# Altium PCB DRV8711MOD.PcbDoc
Units mm, origin at the board's own origin, x right, y up, seen from the top; angles counter-clockwise.
Board outline 81.84 x 52 mm, 2 copper layers (Top Layer, Bottom Layer); 20 components, 34 nets, 159 pads, 268 vias.
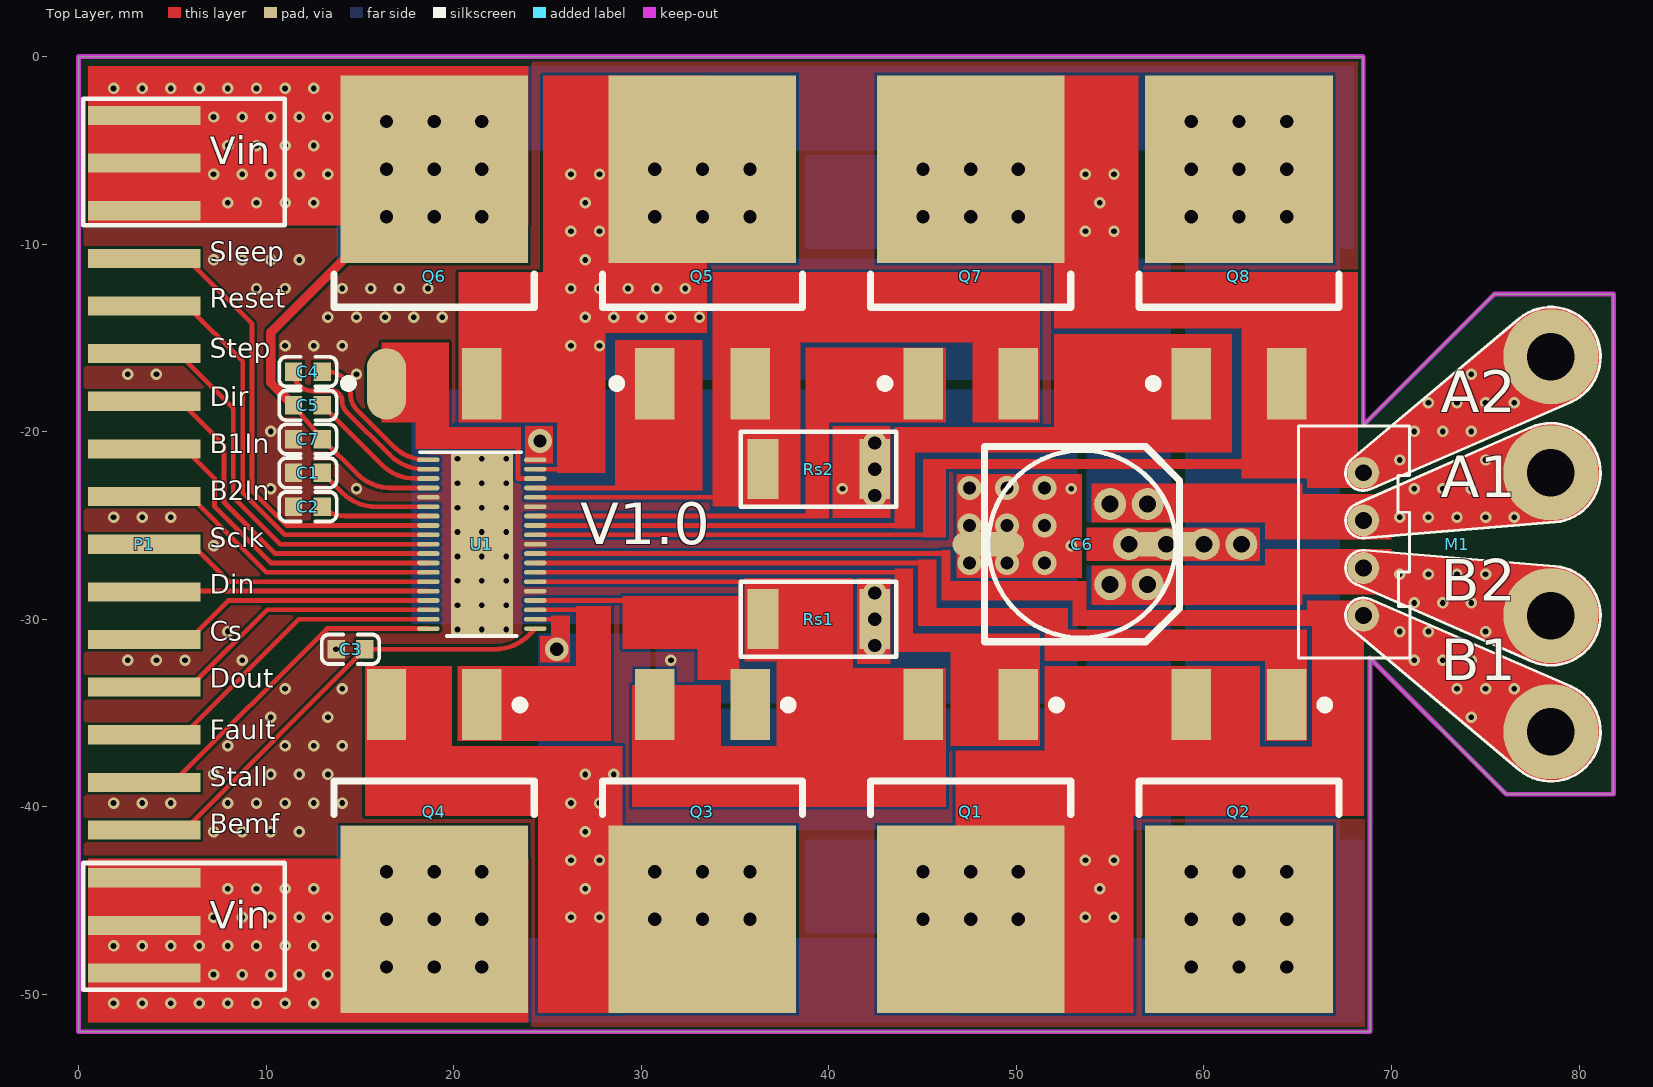
[diagram p0: Top Layer view]
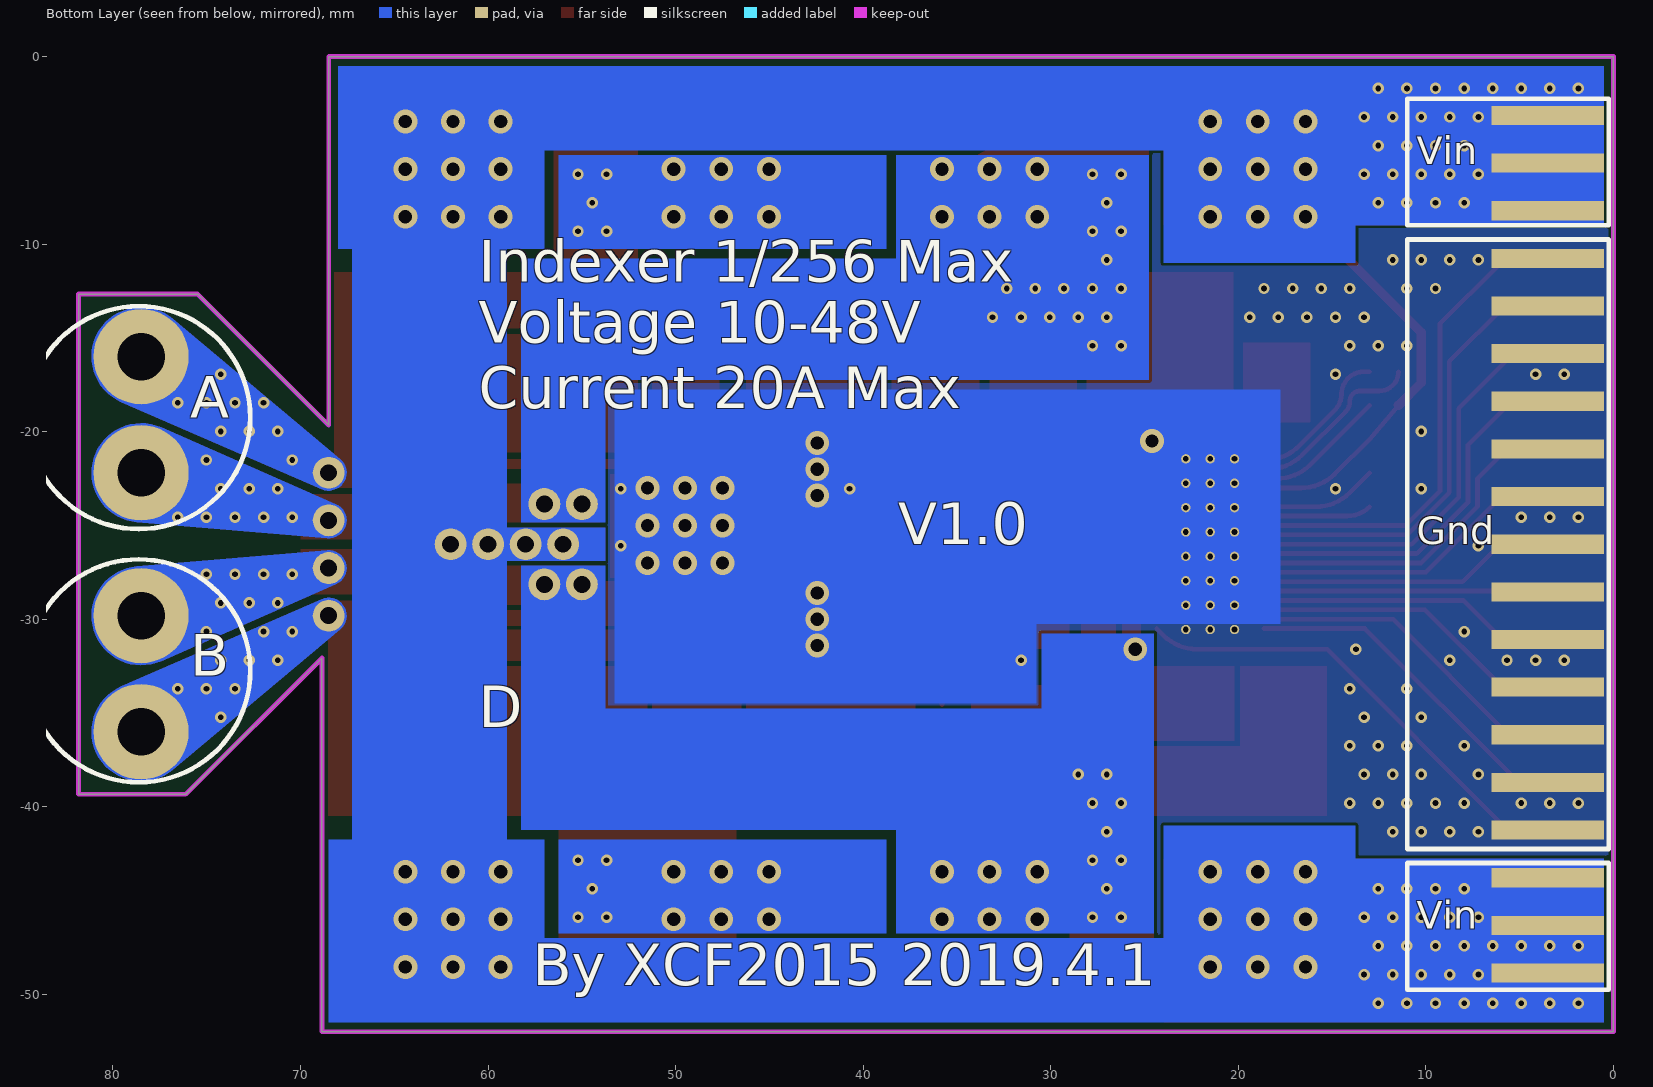
[diagram p1: Bottom Layer view, seen from below]
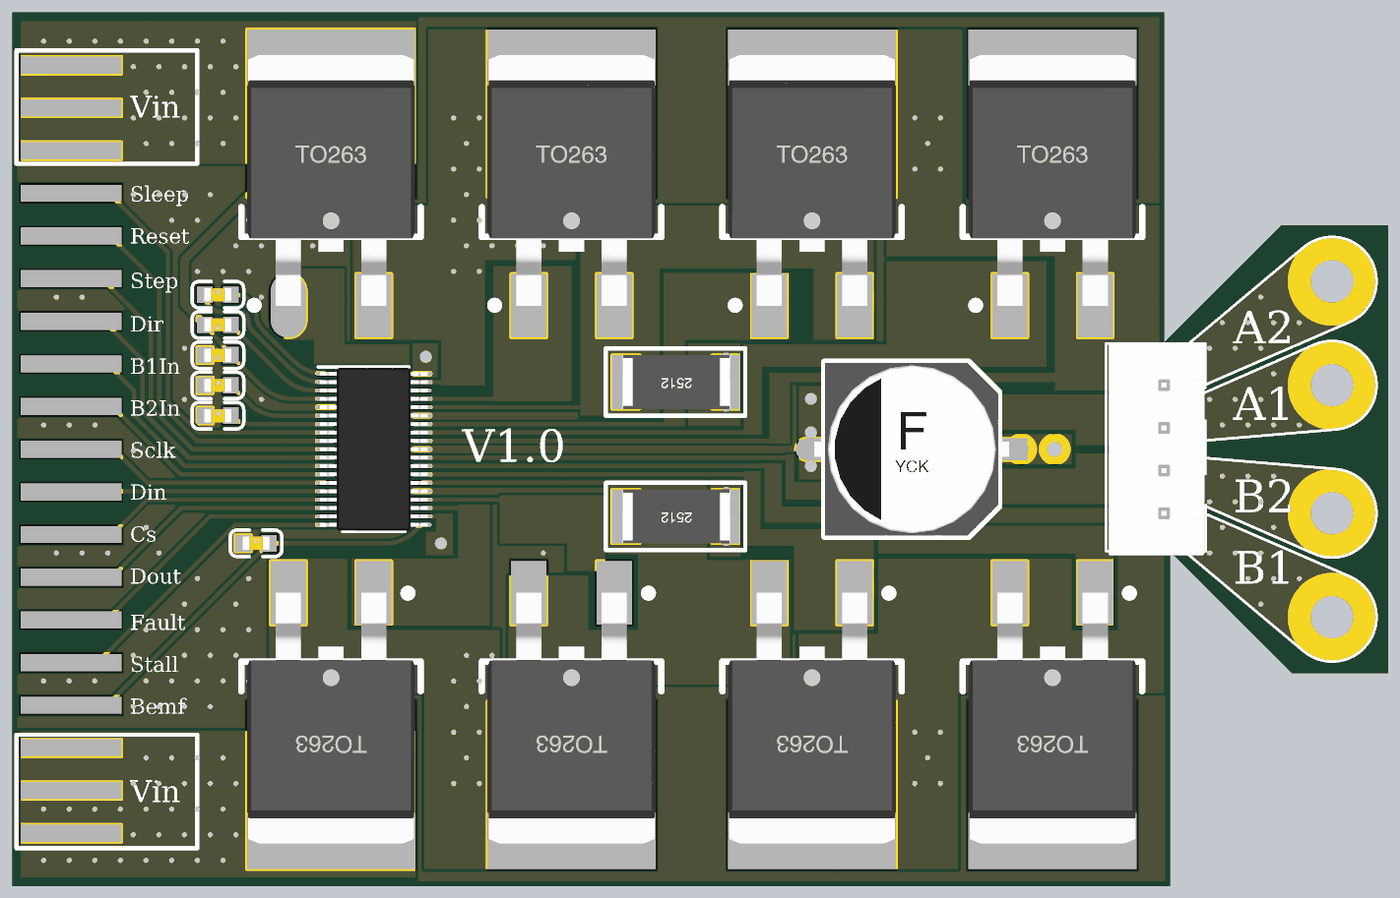
[diagram p2: 3D render of the assembled board from above, using the file's embedded part models]

## Layer stack, top to bottom
Top Solder: solder mask 0.0102, Solder Resist, Dk 3.5
Top Layer: signal copper 0.0356
Dielectric 1: dielectric 0.32, FR-4, Dk 4.8
Bottom Layer: signal copper 0.0356
Bottom Solder: solder mask 0.0102, Solder Resist, Dk 3.5

## Board outline
0,-52 0,0 68.5,0 68.5,-19.65 75.485,-12.665 81.835,-12.665 81.835,-39.335 76.12,-39.335 68.856,-32.071 68.856,-52

## Design rules (kind name [scope] priority, off if disabled: settings)
Clearance [All] p1: gap=0.152 ignorepadtopadclearanceinfootprint=FALSE
HoleSize [All] p1: absolutevalues=TRUE maxlimit=254 minlimit=0.305 maxpercent=80.000 minpercent=20.000
MinimumSolderMaskSliver [All] p1: minsoldermaskwidth=0
PolygonConnect [All] p1: connectstyle=Direct reliefconductorwidth=0.254 reliefentries=4 polygonreliefangle="90 Angle" airgapwidth=0.254
RoutingVias [All] p1: holewidth=0.305 width=0.61 viastyle="Through Hole" minholewidth=0.305 minwidth=0.61 maxholewidth=0.711 maxwidth=1.27
SMDNeckDown [All] p1: percent=120.000
SilkToSilkClearance [All] p1: silktosilkclearance=0
SilkToSolderMaskClearance [IsPad] p1: minsilkscreentomaskgap=0 clearancetoexposedcopper=TRUE
SolderMaskExpansion [All] p1: expansion=0.102
Width [All] p1: maxlimit=254 minlimit=0.152 preferedwidth=0.229
26 further rules are at their usual default settings.

## Components (designator, comment, footprint, x,y, rotation, side; value= is the part's Value field where it differs from the comment)
C1 "100nF(104) 10% 50V" 0603_C 12.23,-22.2 r0 top
C2 "100nF(104) 10% 50V" 0603_C 12.23,-24 r0 top
C3 "100nF(104) 10% 50V" 0603_C 14.5,-31.6 r0 top
C4 "100nF(104) 10% 50V" 0603_C 12.23,-16.8 r0 top
C5 "100nF(104) 10% 50V" 0603_C 12.23,-18.6 r180 top
C6 "220u" "CM F(10*10.2)" 53.5,-26 r0 top
C7 "100nF(104) 10% 50V" 0603_C 12.23,-20.4 r180 top
M1 "12V" MotorStep 68.5,-26 r270 top
P1 "Header 2X11" "TB2.54 19x2" 3.5,-3.14 r0 top
Q1 "2SK3615" IRF3205#1 47.567,-46 r180 top
Q2 "2SK3615" IRF3205#1 61.87,-46 r180 top
Q3 "2SK3615" IRF3205#1 33.263,-46 r180 top
Q4 "2SK3615" IRF3205#1 18.96,-46 r180 top
Q5 "2SK3615" IRF3205#1 33.263,-6 r0 top
Q6 "2SK3615" IRF3205#2 18.96,-6 r0 top
Q7 "2SK3615" IRF3205#1 47.567,-6 r0 top
Q8 "2SK3615" IRF3205#1 61.87,-6 r0 top
Rs1 "0.01R" "R 2512_L" 39.5,-30 r180 top
Rs2 "0.01R" "R 2512_L" 39.5,-22 r180 top
U1 "DRV8711DCPR" DCP0038A_L 21.5,-26 r0 top value=Value

## Footprints (in the part's own frame and the unit in brackets; to place one, negate y for a bottom-side part, rotate by r counter-clockwise, add the part's x,y. Pads: shape width x height; smd on the part's side, far side on the other; paste and mask are expansions set on the pad)
0603_C [mm]
  rect 0.93x0.98 smd: 1(-0.77,0) 2(0.77,0)
  silkscreen extent -1.53,-0.79 1.54,0.79, body extent -0.8,-0.4 0.8,0.4, height 0.3
"CM F(10*10.2)" [mm] "贴片电解电容，直径10mm，高10.2mm"
  rect 3.8x1.3 smd: 1(5,0)
  oval 3.8x1.3 smd: 2(-5,0)
  silkscreen extent -5.2,-5.2 5.2,5.2, body extent -5.8,-5.15 5.8,5.15, height 10.2
DCP0038A_L [mm]
  oval 1.2x0.25 smd paste+0 mask+0.051: 1(-2.85,4.5) 2(-2.85,4) 3(-2.85,3.5) 4(-2.85,3) 5(-2.85,2.5) 6(-2.85,2) 7(-2.85,1.5) 8(-2.85,1) 9(-2.85,0.5) 10(-2.85,0) 11(-2.85,-0.5) 12(-2.85,-1) 13(-2.85,-1.5) 14(-2.85,-2) 15(-2.85,-2.5) 16(-2.85,-3) 17(-2.85,-3.5) 18(-2.85,-4) 19(-2.85,-4.5) 20(2.85,-4.5) 21(2.85,-4) 22(2.85,-3.5) 23(2.85,-3) 24(2.85,-2.5) 25(2.85,-2) 26(2.85,-1.5) 27(2.85,-1) 28(2.85,-0.5) 29(2.85,0) 30(2.85,0.5) 31(2.85,1) 32(2.85,1.5) 33(2.85,2) 34(2.85,2.5) 35(2.85,3) 36(2.85,3.5) 37(2.85,4) 38(2.85,4.5)
  round 0.61 / inner round 1.524 / far side round 0.5 hole 0.305 mask+0.051: 39(-1.3,-4.55) 39(-1.3,-3.25) 39(-1.3,3.25) 39(-1.3,4.55) 39(0,-4.55) 39(0,-3.25) 39(0,-1.95) 39(0,-0.65) 39(0,0.65) 39(0,1.95) 39(0,3.25) 39(0,4.55) 39(1.3,-4.55) 39(1.3,-3.25) 39(1.3,3.25) 39(1.3,4.55)
  round 0.61 / inner round 1.524 / far side round 0.5 hole 0.305 mask-0.152: 39(-1.3,-1.95) 39(-1.3,-0.65) 39(-1.3,0.65) 39(-1.3,1.95) 39(1.3,-1.95) 39(1.3,-0.65) 39(1.3,0.65) 39(1.3,1.95)
  rect 3.302x9.7 smd paste-4.837 mask-4.839: 39(0,0)
  silkscreen extent -3.3,-4.9 2.1,4.9, body extent -3.2,-4.85 3.2,4.85, height 1.09
IRF3205#1 [mm] "263，3脚晶体管"
  rect 2.1x3.8 smd: 1(-2.54,-11.45) 3(2.54,-11.45)
  rect 10x10 smd: 2(0,0)
  silkscreen extent -5.33,-11.63 5.33,-5.59, body extent -5,-11.46 5,3.47, height 4.5
IRF3205#2 [mm] "263，3脚晶体管"
  oval 2.1x3.8 smd: 1(-2.54,-11.45)
  rect 10x10 smd: 2(0,0)
  rect 2.1x3.8 smd: 3(2.54,-11.45)
  silkscreen extent -5.33,-11.63 5.33,-5.59, body extent -5,-11.46 5,3.47, height 4.5
MotorStep [mm] "接插件，4P"
  round 5.08 hole 2.54: 1(-10,10) 2(-3.81,10) 3(3.81,10) 4(10,10)
  round 1.7 hole 0.9: 1(-3.81,0) 2(-1.27,0) 3(1.27,0) 4(3.81,0)
  Top Layer region: -4.539,-0.612 -12.023,8.301 -12.584,9.453 -12.538,10.734 -11.894,11.842 -10.804,12.516 -9.525,12.599 -8.358,12.069 -7.577,11.053 -7.577,11.053 -2.937,0.379 -2.86,-0.062 -2.994,-0.49 -3.309,-0.809 -3.735,-0.949 -4.178,-0.878 -4.539,-0.612
  Top Layer region: -2.141,-0.382 -6.229,8.939 -6.443,10.218 -6.022,11.444 -5.069,12.322 -3.812,12.642 -2.555,12.325 -1.6,11.448 -1.178,10.222 -1.178,10.222 -0.322,0.08 -0.322,0.08 -0.388,-0.357 -0.644,-0.717 -1.036,-0.922 -1.478,-0.929 -1.875,-0.735 -2.141,-0.382
  Top Layer region: 0.322,0.08 0.388,-0.357 0.644,-0.717 1.036,-0.922 1.478,-0.929 1.875,-0.735 2.141,-0.382 2.141,-0.382 2.141,-0.382 6.229,8.939 6.443,10.218 6.022,11.444 5.069,12.322 3.812,12.642 2.555,12.325 1.6,11.448 1.178,10.222 1.178,10.222
  Top Layer region: 2.937,0.379 2.86,-0.062 2.994,-0.49 3.309,-0.809 3.735,-0.949 4.178,-0.878 4.539,-0.612 4.539,-0.612 12.023,8.301 12.584,9.453 12.538,10.734 11.894,11.842 10.804,12.516 9.525,12.599 8.358,12.069 7.577,11.053 7.577,11.053
  Bottom Layer region: -2.937,0.379 -2.86,-0.062 -2.994,-0.49 -3.309,-0.809 -3.735,-0.949 -4.178,-0.878 -4.539,-0.612 -4.539,-0.612 -12.023,8.301 -12.584,9.453 -12.538,10.734 -11.894,11.842 -10.804,12.516 -9.525,12.599 -8.358,12.069 -7.577,11.053 -7.577,11.053
  Bottom Layer region: -0.322,0.08 -0.388,-0.357 -0.644,-0.717 -1.036,-0.922 -1.478,-0.929 -1.875,-0.735 -2.141,-0.382 -2.141,-0.382 -2.141,-0.382 -6.229,8.939 -6.443,10.218 -6.022,11.444 -5.069,12.322 -3.812,12.642 -2.555,12.325 -1.6,11.448 -1.178,10.222 -1.178,10.222
  Bottom Layer region: 2.141,-0.382 6.229,8.939 6.443,10.218 6.022,11.444 5.069,12.322 3.812,12.642 2.555,12.325 1.6,11.448 1.178,10.222 1.178,10.222 0.322,0.08 0.322,0.08 0.388,-0.357 0.644,-0.717 1.036,-0.922 1.478,-0.929 1.875,-0.735 2.141,-0.382
  Bottom Layer region: 4.539,-0.612 12.023,8.301 12.584,9.453 12.538,10.734 11.894,11.842 10.804,12.516 9.525,12.599 8.358,12.069 7.577,11.053 7.577,11.053 2.937,0.379 2.86,-0.062 2.994,-0.49 3.309,-0.809 3.735,-0.949 4.178,-0.878 4.539,-0.612
  Keep-Out Layer lines w0.254: -6.35,0 -13.335,6.985 -13.335,13.335 13.335,13.335 13.335,7.62 6.071,0.356
  silkscreen extent -12.64,-3.45 12.64,12.64, body extent -6.31,-3.3 6.31,2.4, height 7.03
"R 2512_L" [mm] "1W贴片电阻"
  rect 1.65x3.2 smd: 1(-2.95,0) 2(3,0)
  silkscreen extent -4.1,-2 4.2,2, body extent -3.2,-1.6 3.2,1.6, height 0.55
"TB2.54 19x2" [mm]
  rect 6x1.02 smd: 1(0,0) 3(0,-2.54) 5(0,-5.08) 7(0,-7.62) 9(0,-10.16) 11(0,-12.7) 13(0,-15.24) 15(0,-17.78) 17(0,-20.32) 19(0,-22.86) 21(0,-25.4) 23(0,-27.94) 25(0,-30.48) 27(0,-33.02) 29(0,-35.56) 31(0,-38.1) 33(0,-40.64) 35(0,-43.18) 37(0,-45.72)
  rect 6x1.02 smd far side: 2(0,0) 4(0,-2.54) 6(0,-5.08) 8(0,-7.62) 10(0,-10.16) 12(0,-12.7) 14(0,-15.24) 16(0,-17.78) 18(0,-20.32) 20(0,-22.86) 22(0,-25.4) 24(0,-27.94) 26(0,-30.48) 28(0,-33.02) 30(0,-35.56) 32(0,-38.1) 34(0,-40.64) 36(0,-43.18) 38(0,-45.72)

## Part data
C1 C2 C3 C4 C5 C7: library part "0805 100nF(104) 10% 50V", "贴片电容", Package=0805, SuppliersPartNumber=C49678, ComponentLink1Description=供?, ComponentLink1URL=http://www.szlcsc.com/product/details_50686.html, Supplier=LC
C6: library part Cp, "Polarized Capacitor (Axial)", LatestRevisionDate=17-Jul-2002, LatestRevisionNote="Re-released for DXP Platform.", PackageDescription="Polarized Capacitor; 2 Leads", PackageReference=POLAR0.8, Published=8-Jun-2000, Publisher="Altium Limited"
M1: library part MotorStep, "直流电机"
P1: library part "Header 19X2", "19*2P接插件", BOM名称=1
Q1 Q2 Q3 Q4 Q5 Q6 Q7 Q8: library part NMOS, "N沟场效应管"
Rs1 Rs2: library part Rs
U1: "Imported", Manufacturer="Texas Instruments", PartNumber=DRV8711DCPR, RefDes=RefDes, Type=TYPE

## Free pads (board coordinates)
  round 1.7 hole 0.9: 4(55,-28.141) 4(55,-23.859) 5(58,-26) 6(56,-26) 6(60,-26) 8(62,-26) 9(57,-23.859) 10(57,-28.141)

## Via types
v1: diameter 0.61, hole 0.305, Top Layer to Bottom Layer, tented both sides, 191 vias
v2: diameter 1.27, hole 0.711, Top Layer to Bottom Layer, tented both sides, 77 vias

## Nets (pads, with @x,y where several pads share a name; then routed paths per layer and width w, separated by ;. In a path a pad name is that pad's centre, name@x,y a point inside that pad or via, vN(x,y) a via of type N, cw(c..) or ccw(c..) an arc to the next point about the centre after c; other vN are vias at no path point)
A1Hs: Q6.1 U1.36 | length 10.7
  Top Layer w0.254: Q6.1 19.331,-20.361 22.872,-20.361 ; 23.43,-20.4 23.43,-22.5 U1.36
A1Ls: Q5.1 U1.35 | length 7.2
  Top Layer w0.254: U1.35 28.75,-23 ; 30.723,-20.277 Q5.1
A1Out: M1.2 pad.4@55,-23.859 pad.9 Q5.2 Q6.3 U1.37 | length 21.8
  Top Layer w0.254: Q6.3@21.813,-17.45 23.45,-17.45 ; U1.37 26.2,-22 26.2,-20.2
  Top Layer w2: Q6.3 21.813,-17.45 v2(33.263,-6)
  other v1: 70.446,-24.56 71.97,-24.56 73.494,-24.56 75.018,-24.56 76.542,-24.56 71.208,-23.036 72.732,-23.036 74.256,-23.036 75.018,-21.512 26.25,-15.416 27.774,-15.416 27.012,-13.892 28.536,-13.892 30.06,-13.892 31.584,-13.892 33.108,-13.892 26.25,-12.368 27.774,-12.368 29.298,-12.368 30.822,-12.368 32.346,-12.368 27.012,-10.844 26.25,-9.32 27.774,-9.32 27.012,-7.796 26.25,-6.272 27.774,-6.272
  other v2: 30.723,-8.54 33.263,-8.54 35.803,-8.54 30.723,-6 35.803,-6
A2Hs: Q8.1 U1.31 | length 20
  Top Layer w0.254: U1.31 44.3,-25
A2Ls: Q7.1 U1.32 | length 15.4
  Top Layer w0.254: U1.32 39.75,-24.5
A2Out: M1.1 Q7.2 Q8.3 U1.30 | length 34.9
  Top Layer w0.254: U1.30 45.9,-25.5
  Top Layer w2: 54.928,-13.361 64.111,-13.361 64.41,-13.66 Q8.3
  other v1: 70.446,-21.512 71.208,-19.988 72.732,-19.988 74.256,-19.988 71.97,-18.464 73.494,-18.464 75.018,-18.464 76.542,-18.464 74.256,-16.94 53.682,-9.32 55.206,-9.32 54.444,-7.796 53.682,-6.272 55.206,-6.272
  other v2: 45.027,-8.54 47.567,-8.54 50.107,-8.54 45.027,-6 47.567,-6 50.107,-6
Ap: Q5.3 Q7.3 Rs2.2 U1.34 | length 31.8
  Top Layer w0.254: U1.34 35,-23.5 ; Rs2.2 36.5,-18.147 Q5.3 38.253,-15 47.657,-15 Q7.3
B1Hs: Q2.1 U1.27 | length 22.1
  Top Layer w0.254: U1.27 45.3,-27 ; Q2.1 Q2.1@64.41,-33.41
B1In: P1.15 U1.12 | length 16.2
  Top Layer w0.254: P1.15@5.763,-21.012 7.25,-22.5 7.25,-24 10.25,-27 U1.12
B1Ls: Q1.1 U1.26 | length 19.7
  Top Layer w0.254: U1.26 44,-27.5
B1Out: M1.4 Q1.2 Q2.3 U1.28 | length 38.4
  Top Layer w0.254: U1.28 46.25,-26.5
  Top Layer w2: v2(47.567,-46) v2(50.107,-43.46) 59.017,-34.55 Q2.3
  other v1: 53.682,-45.896 55.206,-45.896 54.444,-44.372 53.682,-42.848 55.206,-42.848 74.256,-35.228 73.494,-33.704 75.018,-33.704 76.542,-33.704 71.208,-32.18 72.732,-32.18 74.256,-32.18 70.446,-30.656 71.97,-30.656
  other v2: 45.027,-46 50.107,-46 45.027,-43.46 47.567,-43.46
B2Hs: Q4.1 U1.22 | length 11.9
  Top Layer w0.254: Q4.1 24.837,-34.55 26.986,-32.401 26.986,-29.586 26.9,-29.5 U1.22
B2In: P1.17 U1.13 | length 14
  Top Layer w0.254: P1.17@6.187,-23.687 10,-27.5 U1.13
B2Ls: Q3.1 U1.23 | length 14.5
  Top Layer w0.254: U1.23 31.45,-29 35.803,-33.353 Q3.1
B2Out: M1.3 pad.4@55,-28.141 pad.10 Q3.2 Q4.3 U1.21 | length 6.4
  Top Layer w0.254: U1.21 25.4,-30
  Top Layer w2: 21.12,-39.25 26.513,-39.25
  other v1: 26.25,-45.896 27.774,-45.896 27.012,-44.372 26.25,-42.848 27.774,-42.848 27.012,-41.324 26.25,-39.8 27.774,-39.8 27.012,-38.276 28.536,-38.276 75.018,-30.656 71.208,-29.132 72.732,-29.132 74.256,-29.132 70.446,-27.608 71.97,-27.608 73.494,-27.608 75.018,-27.608
  other v2: 30.723,-46 33.263,-46 35.803,-46 30.723,-43.46 33.263,-43.46 35.803,-43.46 25.5,-31.6
Bp: Q1.3 Q3.3 Rs1.2 U1.25 | length 16.6
  Top Layer w0.254: U1.25 41,-28
Cs: P1.23 U1.16 | length 13
  Top Layer w0.254: P1.23@6.35,-30.65 8,-29 U1.16
Din: P1.21 U1.15 | length 12.9
  Top Layer w0.254: P1.21@5.75,-28.5 U1.15
Dir: P1.13 U1.11 | length 18.1
  Top Layer w0.254: P1.13@5.64,-18.59 7.75,-20.7 7.75,-23.75 10.5,-26.5 U1.11
Dout: P1.25 U1.17 | length 14.1
  Top Layer w0.254: P1.25@6.15,-33.4 10.05,-29.5 U1.17
Fault: P1.27 U1.18 | length 15.6
  Top Layer w0.254: P1.27@5.625,-36.125 11.75,-30 U1.18
GND: C1.1 C2.1 C3.1 C6.2 C7.2 P1.8 P1.10 P1.12 P1.14 P1.16 P1.18 P1.20 P1.22 P1.24 P1.26 P1.28 P1.30 P1.32 Rs1.1 Rs2.1 U1.5 U1.24 U1.29 U1.33 U1.38 U1.39
  other v1: 7.2,-41.324 8.724,-41.324 10.248,-41.324 11.772,-41.324 1.866,-39.8 3.39,-39.8 4.914,-39.8 7.962,-39.8 9.486,-39.8 11.01,-39.8 12.534,-39.8 14.058,-39.8 7.2,-38.276 10.248,-38.276 11.772,-38.276 13.296,-38.276 7.962,-36.752 11.01,-36.752 12.534,-36.752 14.058,-36.752 10.248,-35.228 13.296,-35.228 11.01,-33.704 14.058,-33.704 2.628,-32.18 4.152,-32.18 5.676,-32.18 8.724,-32.18 31.584,-32.18 13.73,-31.6 7.962,-30.656 7.2,-26.084 52.92,-26.084 1.866,-24.56 3.39,-24.56 4.914,-24.56 10.248,-23.036 14.82,-23.036 40.728,-23.036 52.92,-23.036 10.248,-19.988 2.628,-16.94 4.152,-16.94 14.82,-16.94 11.01,-15.416 12.534,-15.416 14.058,-15.416 13.296,-13.892 14.82,-13.892 16.344,-13.892 17.868,-13.892 19.392,-13.892 9.486,-12.368 11.01,-12.368 14.058,-12.368 15.582,-12.368 17.106,-12.368 18.63,-12.368 7.2,-10.844 8.724,-10.844 10.248,-10.844 11.772,-10.844
  other v2: 42.45,-31.4 42.45,-30 42.45,-28.6 47.5,-27 49.5,-27 51.5,-27 47.5,-25 49.5,-25 51.5,-25 42.45,-23.4 47.5,-23 49.5,-23 51.5,-23 42.45,-22 42.45,-20.6 24.6,-20.5
NetC1_2: C1.2 U1.6 | length 6.3
  Top Layer w0.254: C1.2 14.056,-23.256 ccw(c15.852,-21.46) 15.852,-24 U1.6
NetC2_2: C2.2 U1.7 | length 5.8
  Top Layer w0.254: C2.2 ccw(c14.207,-22.793) 14.207,-24.5 U1.7
NetC3_2: C3.2 P1.31 U1.20 | length 25.2
  Top Layer w0.254: P1.31 5.63,-41.24 C3.2 22.198,-31.6 ccw(c22.198,-29.06) 23.994,-30.856 U1.20
NetC4_1: C4.1 U1.2 | length 9.6
  Top Layer w0.254: C4.1 ccw(c12.491,-16.8) 12.491,-17.831 13.507,-17.831 cw(c13.507,-18.38) 14.056,-18.38 ccw(c14.838,-18.38) 14.285,-18.933 16.608,-21.256 ccw(c18.404,-19.46) 18.404,-22 U1.2
NetC4_2: C4.2 U1.1 | length 7.9
  Top Layer w0.254: C4.2 13.3,-16.8 cw(c13.3,-18) 14.5,-18 ccw(c15.707,-18) 14.854,-18.854 16.756,-20.756 ccw(c18.552,-18.96) 18.552,-21.5 U1.1
NetC5_1: C5.1 U1.3 | length 7.2
  Top Layer w0.254: C5.1 16.156,-21.756 ccw(c17.952,-19.96) 17.952,-22.5 U1.3
Reset: P1.9 U1.9 | length 22
  Top Layer w0.254: P1.9@5.775,-13.275 8.75,-16.25 8.75,-23.25 11,-25.5 U1.9
Sclk: P1.19 U1.14 | length 13.3
  Top Layer w0.254: P1.19@6.14,-26.11 8.029,-28 U1.14
Sleep: P1.7 U1.8 | length 23.5
  Top Layer w0.254: P1.7@6.125,-11.125 9.25,-14.25 9.25,-23.175 11.075,-25 U1.8
Stall: P1.29 U1.19 | length 18.5
  Top Layer w0.254: P1.29 5.05,-38.7 13.25,-30.5 U1.19
Step: P1.11 U1.10 | length 19.8
  Top Layer w0.254: P1.11@5.69,-16.19 8.25,-18.75 8.25,-23.5 10.75,-26 U1.10
Vin: C5.2 C6.1 C7.1 P1.1 P1.2 P1.3 P1.4 P1.5 P1.6 P1.33 P1.34 P1.35 P1.36 P1.37 P1.38 pad.5 pad.6 pad.8 Q2.2 Q4.2 Q6.2 Q8.2 U1.4 | length 25.7
  Top Layer w0.254: C5.2 C7.1 14.856,-22.256 ccw(c16.652,-20.46) 16.652,-23 U1.4
  Top Layer w0.508: C5.2 10.25,-17.39 10.25,-14.71 v2(18.96,-6)
  other v1: 1.866,-50.468 3.39,-50.468 4.914,-50.468 6.438,-50.468 7.962,-50.468 9.486,-50.468 11.01,-50.468 12.534,-50.468 7.2,-48.944 8.724,-48.944 10.248,-48.944 11.772,-48.944 13.296,-48.944 1.866,-47.42 3.39,-47.42 4.914,-47.42 6.438,-47.42 7.962,-47.42 9.486,-47.42 11.01,-47.42 12.534,-47.42 7.2,-45.896 8.724,-45.896 10.248,-45.896 11.772,-45.896 13.296,-45.896 7.962,-44.372 9.486,-44.372 11.01,-44.372 12.534,-44.372 7.962,-7.796 9.486,-7.796 11.01,-7.796 12.534,-7.796 7.2,-6.272 8.724,-6.272 10.248,-6.272 11.772,-6.272 13.296,-6.272 7.962,-4.748 9.486,-4.748 11.01,-4.748 12.534,-4.748 7.2,-3.224 8.724,-3.224 10.248,-3.224 11.772,-3.224 13.296,-3.224 1.866,-1.7 3.39,-1.7 4.914,-1.7 6.438,-1.7 7.962,-1.7 9.486,-1.7 11.01,-1.7 12.534,-1.7
  other v2: 16.42,-48.54 18.96,-48.54 21.5,-48.54 59.33,-48.54 61.87,-48.54 64.41,-48.54 16.42,-46 18.96,-46 21.5,-46 59.33,-46 61.87,-46 64.41,-46 16.42,-43.46 18.96,-43.46 21.5,-43.46 59.33,-43.46 61.87,-43.46 64.41,-43.46 16.42,-8.54 18.96,-8.54 21.5,-8.54 59.33,-8.54 61.87,-8.54 64.41,-8.54 16.42,-6 21.5,-6 59.33,-6 61.87,-6 64.41,-6 16.42,-3.46 18.96,-3.46 21.5,-3.46 59.33,-3.46 61.87,-3.46 64.41,-3.46

## Polygon pours and split planes (outlines as drawn)
GND on Top Layer "Top Layer-GND" (solid, remove dead copper, pour order 6): 0,-52 0,0 68.5,0 68.5,-19.65 75.485,-12.665 81.835,-12.665 81.835,-39.335 76.12,-39.335 68.856,-32.071 68.856,-52
no net on Top Layer "Top Layer-No Net" (solid, pour order 2): 68.58,-25.678
no net on Top Layer "Top Layer-No Net 1" (solid, pour order 0): 46.5,-37
GND on Bottom Layer "Bottom Layer-GND" (solid, remove dead copper, pour order 4): 0,-52 0,0 68.5,0 68.5,-19.65 75.485,-12.665 81.835,-12.665 81.835,-39.335 76.12,-39.335 68.856,-32.071 68.856,-52

## Keep-outs
Keep-Out Layer:
  lines w0.254: 68.5,-19.65 68.5,0 0,0 0,-52 68.856,-52 68.856,-32.071

## Other copper
Top Layer:
  rectangle net Vin: 0.5,-9 24,-0.5
  rectangle net Vin: 0.5,-51.5 23.994,-42.75
  rectangle net GND: 46.8,-27.8 53.5,-22.25
  rectangle net GND: 40.2,-24.6 43.3,-19.7
  rectangle net GND: 41.5,-32.4 43.3,-27.8
  rectangle net Bp: 37.2,-33.8 41.3,-31.3
  rectangle net Vin: 53.75,-26.9 63,-25.1
  rectangle net B2Out: 54,-29.25 65.25,-27.144
  rectangle net B1Out: 53,-30 53.75,-27.961
  rectangle net B1Out: 65.5,-30.25 69,-29
  rectangle net A2Out: 65.5,-23 69,-21.75
  rectangle net A1Out: 54,-24.856 65.25,-22.75
  rectangle net A1Out: 63.25,-25.75 70,-23.328
  rectangle net B2Out: 63.25,-28.672 70,-26.25
  rectangle net B2Out: 24.6,-32.3 26.1,-30.9
  rectangle net B2Out: 25.2,-32.3 26.2,-29.81
  rectangle net B2Hs: 26.513,-32.9 28.4,-29.3
  rectangle net B2Hs: 20.2,-36.5 28.4,-32.5
  rectangle net GND: 23.8,-21.7 25.3,-19.7
  rectangle net A1Hs: 16.156,-19.5 18.75,-15.25
  rectangle net A1Hs: 17.952,-20.92 19.75,-15.25
  rectangle net A1Hs: 17.952,-20.92 23.6,-19.75
  rectangle net B2Ls: 29,-31.6 34,-28.75
  rectangle net B2Ls: 33,-33.25 35.25,-28.75
  rectangle net A1Out: 25.5,-22.2 28.1,-18.6
  rectangle net A1Ls: 28.6,-23.14 33.263,-15.1
  rectangle net B1Out: 53,-30.374 66.1,-29.5
  rectangle net B1Out: 46,-29 53.75,-27.961
  rectangle net B1Out: 46,-28.994 46.5,-26.312
  rectangle net B1Hs: 44.75,-30.25 45.75,-26.828
  rectangle net B1Hs: 44.75,-30.374 52.75,-29.406
  rectangle net B1Hs: 51.5,-31.5 52.75,-29.4
  rectangle net B1Hs: 51.5,-32.229 64.41,-30.55
  rectangle net B1Hs: 63.25,-36.5 65.5,-30.55
  rectangle net B1Ls: 43.5,-31.75 44.5,-27.3
  rectangle net B1Ls: 43.5,-31.75 51.25,-30.75
  rectangle net B1Ls: 46.5,-36.75 51.25,-30.75
  rectangle net A2Out: 45.027,-25.654 46.25,-21.75
  rectangle net A2Out: 45.027,-22 63,-21.45
  rectangle net A2Hs: 43.5,-25.15 44.6,-19.75
  rectangle net A2Ls: 39.75,-19.5 46.25,-15.5
  rectangle net A2Ls: 38.75,-24.632 40,-15.5
  rectangle net A2Hs: 44,-21.107 55.25,-19.75
  rectangle net A2Hs: 52,-21.107 61.5,-14.803
  rectangle net B1Out: 60.5,-40.5 67.25,-36.776
  rectangle net B1Out: 65.75,-40.5 68.524,-29.551
  rectangle net B1Out: 51.5,-40.5 63,-32.5
  rectangle net B1Out: 46.75,-51 56.25,-37
  rectangle net B2Out: 15.27,-39 19.9,-32.5
  rectangle net B2Out: 15.27,-40.5 24.837,-36.75
  rectangle net B2Out: 24.5,-51 29,-36.75
  rectangle net A1Out: 20.25,-19.5 28.1,-11.5
  rectangle net A1Out: 24.75,-14.75 33.5,-1
  rectangle net A2Out: 52,-14.5 56.5,-1
  rectangle net A2Out: 53.75,-14.5 63,-11.5
  rectangle net A2Out: 62,-22.5 68.216,-11.5
  rectangle net Bp: 33.75,-40 38.253,-36.75
  rectangle net Bp: 29.5,-40 34.25,-33.5
  rectangle net Bp: 37.2,-40 46.25,-32.6
  rectangle net Bp: 35.5,-32.25 41.3,-27.8
  rectangle net Ap: 47.657,-19.5 51.25,-15
  rectangle net Ap: 37.5,-15.25 51.25,-11.5
  rectangle net Ap: 33.8,-24 38.5,-11.5
Bottom Layer:
  rectangle net Vin: 0.5,-9 14.5,-0.5
  rectangle net Vin: 0.5,-51.5 16,-42.75
  rectangle net GND: 17.75,-30.25 31.5,-17.75
  rectangle net GND: 30.75,-34.5 53.25,-17.75
  rectangle net Vin: 53.75,-26.9 59.25,-25.1
  rectangle net Vin: 59,-42.25 67.25,-4.25
  rectangle net Vin: 13.75,-11 24,-0.5
  rectangle net Vin: 22,-5 68,-0.5
  rectangle net Vin: 57,-10.25 68,-2.5
  rectangle net A2Out: 38.75,-10.25 56.25,-5.25
  rectangle net B1Out: 38.75,-46.75 56.25,-41.75
  rectangle net Vin: 57,-49.5 68.5,-41.75
  rectangle net Vin: 22,-51.5 68.5,-47
  rectangle net Vin: 13.75,-51.5 24,-41
  rectangle net B2Out: 24.5,-46.75 30.5,-30.75
  rectangle net B2Out: 30,-41.24 57,-34.75
  rectangle net B2Out: 53.75,-41.24 58.25,-27.144
  rectangle net A1Out: 53.75,-24.856 58.25,-10.76
  rectangle net A1Out: 30,-17.25 57.5,-10.76
  rectangle net A1Out: 24.75,-17.25 38.25,-5.25
  rectangle net B2Out: 30,-46.75 38.25,-35

## Silkscreen, mask and mechanical layers (free items; w line width, h text height)
Top Overlay:
  lines w0.254: 0.25,-49.75 11,-49.75 11,-43 0.25,-43 0.25,-49.75 ; 0.25,-9 0.25,-2.25 11,-2.25 11,-9 0.25,-9
  text "Vin" at 7,-6.25 h2.54
  text "Sleep" at 7,-11.25 h1.78
  text "Reset" at 7,-13.75 h1.78
  text "Step" at 7,-16.41 h1.78
  text "Dir" at 7,-18.99 h1.78
  text "A2" at 72.62,-19.701 h3.81
  text "B1In" at 7,-21.5 h1.78
  text "B2In" at 7,-24 h1.78
  text "A1" at 72.62,-24.25 h3.81
  text "Sclk" at 7,-26.5 h1.78
  text "V1.0" at 26.75,-26.75 h3.81
  text "Din" at 7,-29 h1.78
  text "B2" at 72.62,-29.75 h3.81
  text "Cs" at 7,-31.5 h1.78
  text "Dout" at 7,-34 h1.78
  text "B1" at 72.62,-34 h3.81
  text "Fault" at 7,-36.75 h1.78
  text "Stall" at 7,-39.25 h1.78
  text "Bemf" at 7,-41.75 h1.78
  text "Vin" at 7,-47 h2.54
Bottom Overlay:
  circle w0.254: c78.62,-32.75 r5.942
  circle w0.254: c78.62,-19.25 r5.942
  lines w0.254: 0.25,-49.75 0.25,-43 11,-43 11,-49.75 0.25,-49.75 ; 0.25,-42.25 0.25,-9.75 11,-9.75 11,-42.25 0.25,-42.25 ; 0.25,-9 0.25,-2.25 11,-2.25 11,-9 0.25,-9
  text "Vin" at 10.5,-6.25 h2.54
  text "Indexer 1/256 Max" at 60.5,-12.75 h3.81
  text "Voltage 10-48V" at 60.5,-16 h3.81
  text "Current 20A Max" at 60.5,-19.5 h3.81
  text "A" at 75.87,-20 h3.81
  text "Gnd" at 10.5,-26.5 h2.54
  text "V1.0" at 38.12,-26.75 h3.81
  text "B" at 75.87,-33.75 h3.81
  text "D" at 60.5,-36.5 h3.81
  text "Vin" at 10.5,-47 h2.54
  text "2019.4.1" at 38,-50.25 h3.81
  text "By XCF2015" at 57.62,-50.25 h3.81
Bottom Solder:
  rectangle: 19.62,-31 23.37,-21
  rectangle: 29.763,-9.5 36.763,-5
  rectangle: 44.067,-9.5 51.067,-5
  rectangle: 29.763,-47 36.763,-42.5
  rectangle: 44.067,-47 51.067,-42.5
  rectangle: 58.37,-49.5 65.37,-42.5
  rectangle: 15.46,-49.5 22.46,-42.5
  rectangle: 15.46,-9.5 22.46,-2.5
  rectangle: 58.37,-9.5 65.37,-2.5